# Altium PCB Power_switch_pcb.PcbDoc
Units mm, origin at the board's own origin, x right, y up, seen from the top; angles counter-clockwise.
Board outline 30 x 30 mm, 2 copper layers (Top Layer, Bottom Layer), stack 0.891 mm thick; 44 components, 20 nets, 133 pads, 42 vias.
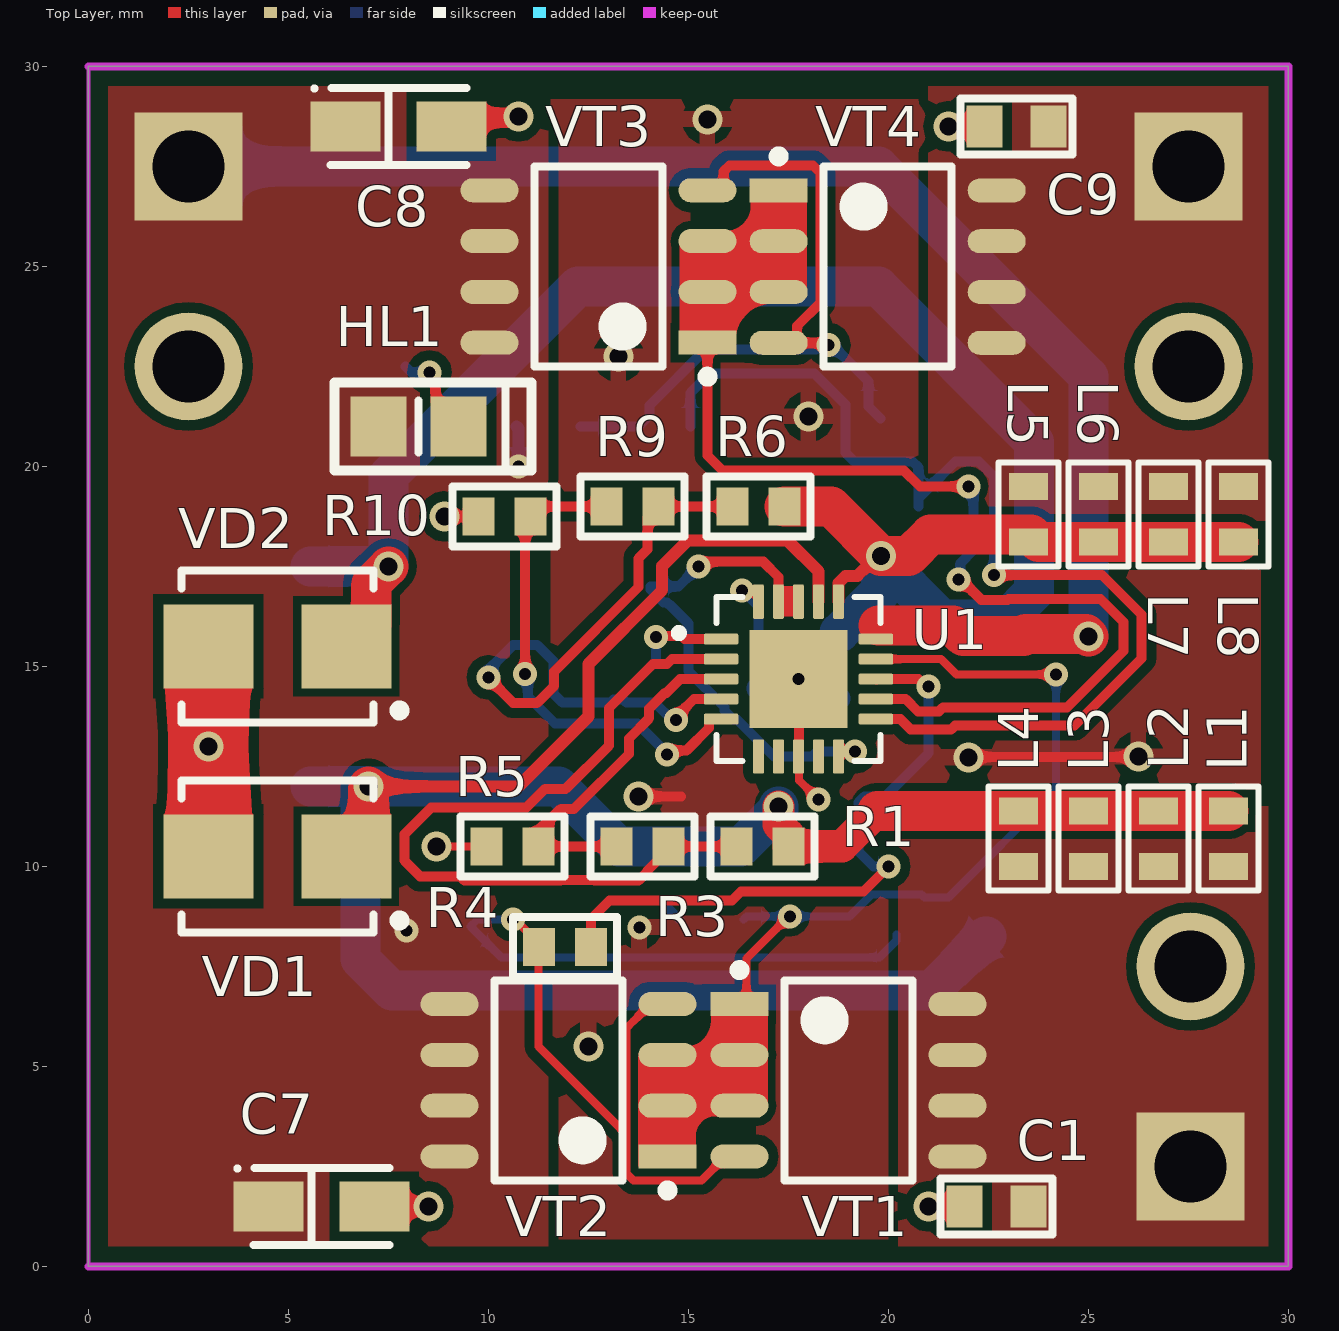
[diagram p0: Top Layer view]
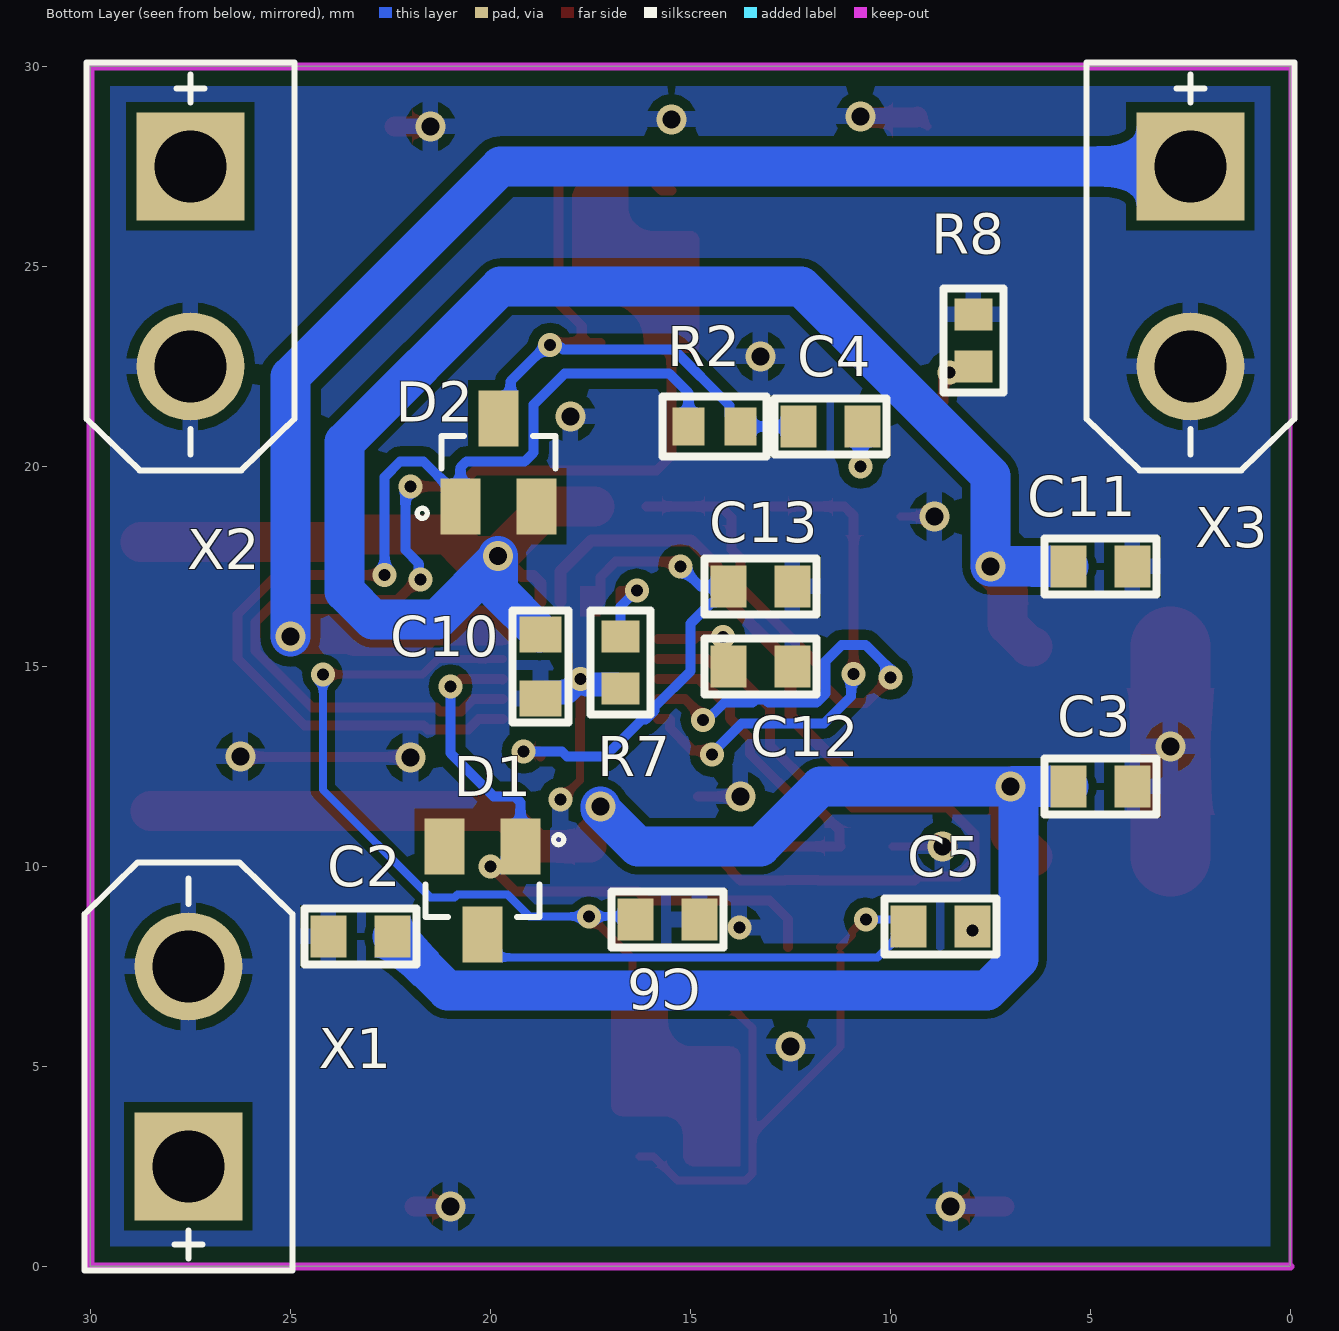
[diagram p1: Bottom Layer view, seen from below]
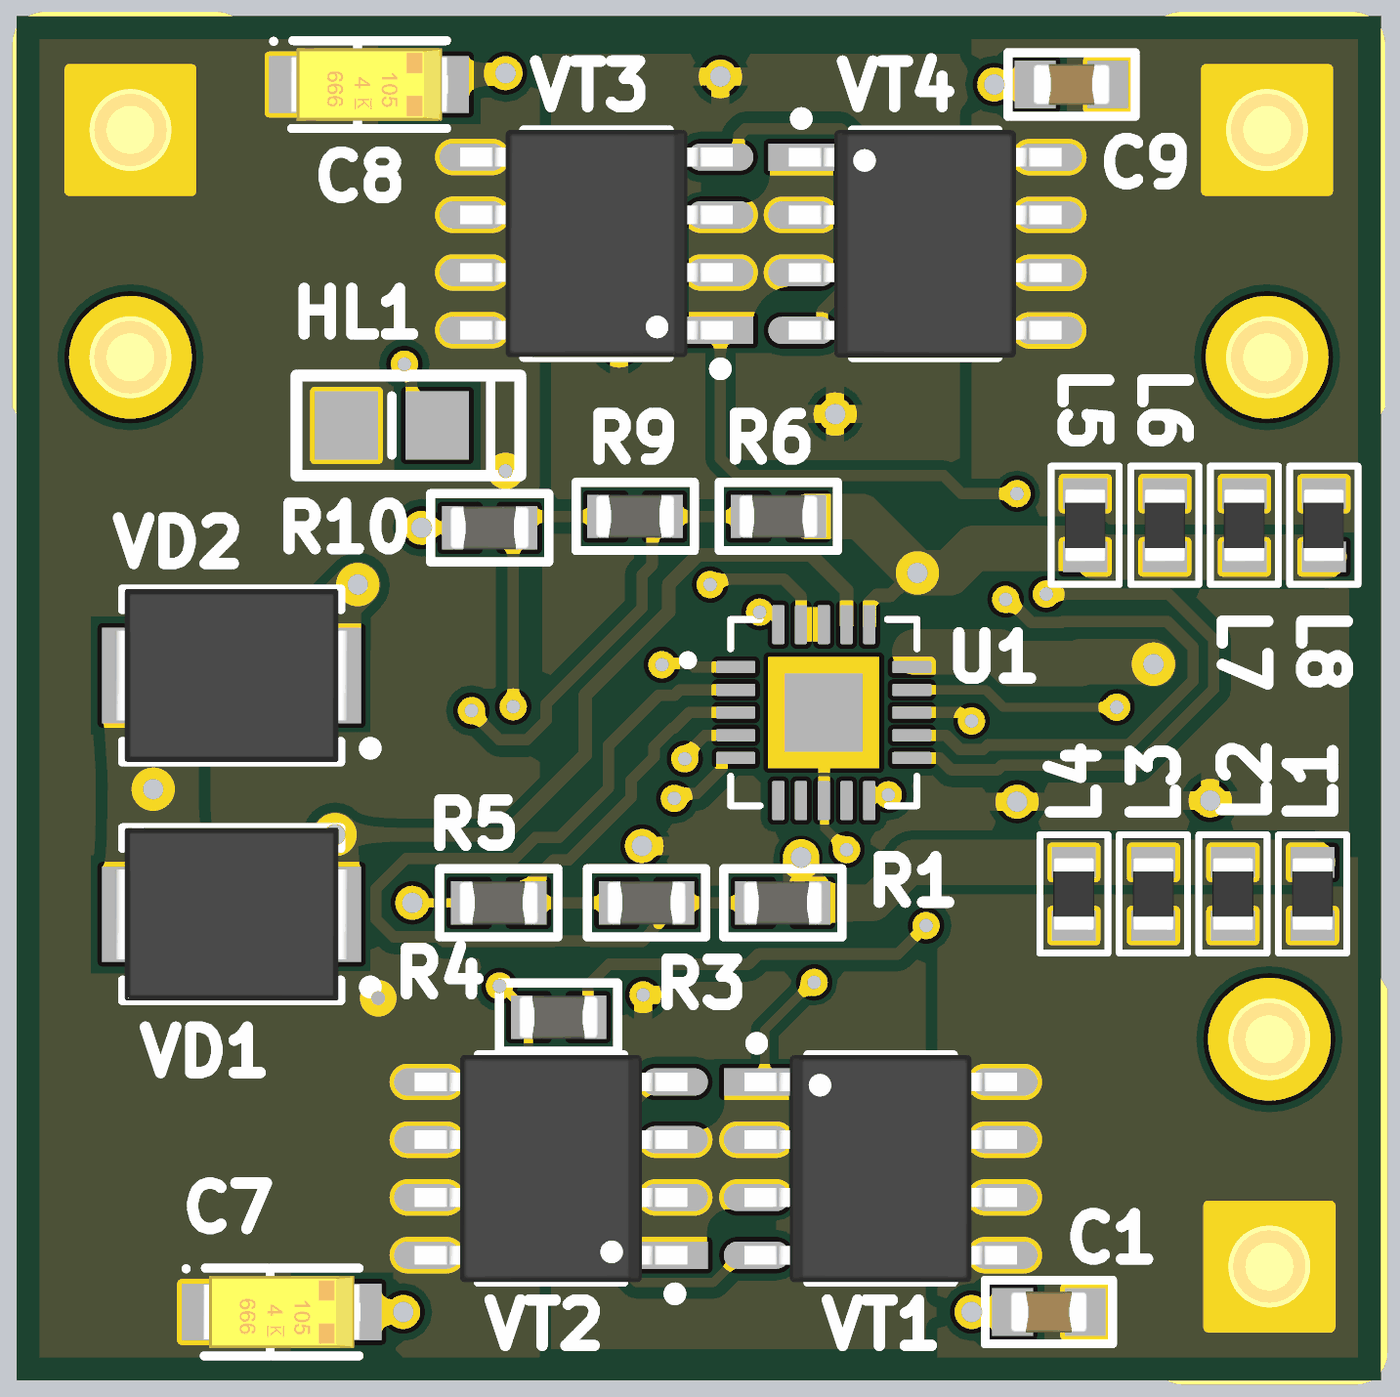
[diagram p2: 3D render of the assembled board from above, using the file's embedded part models]
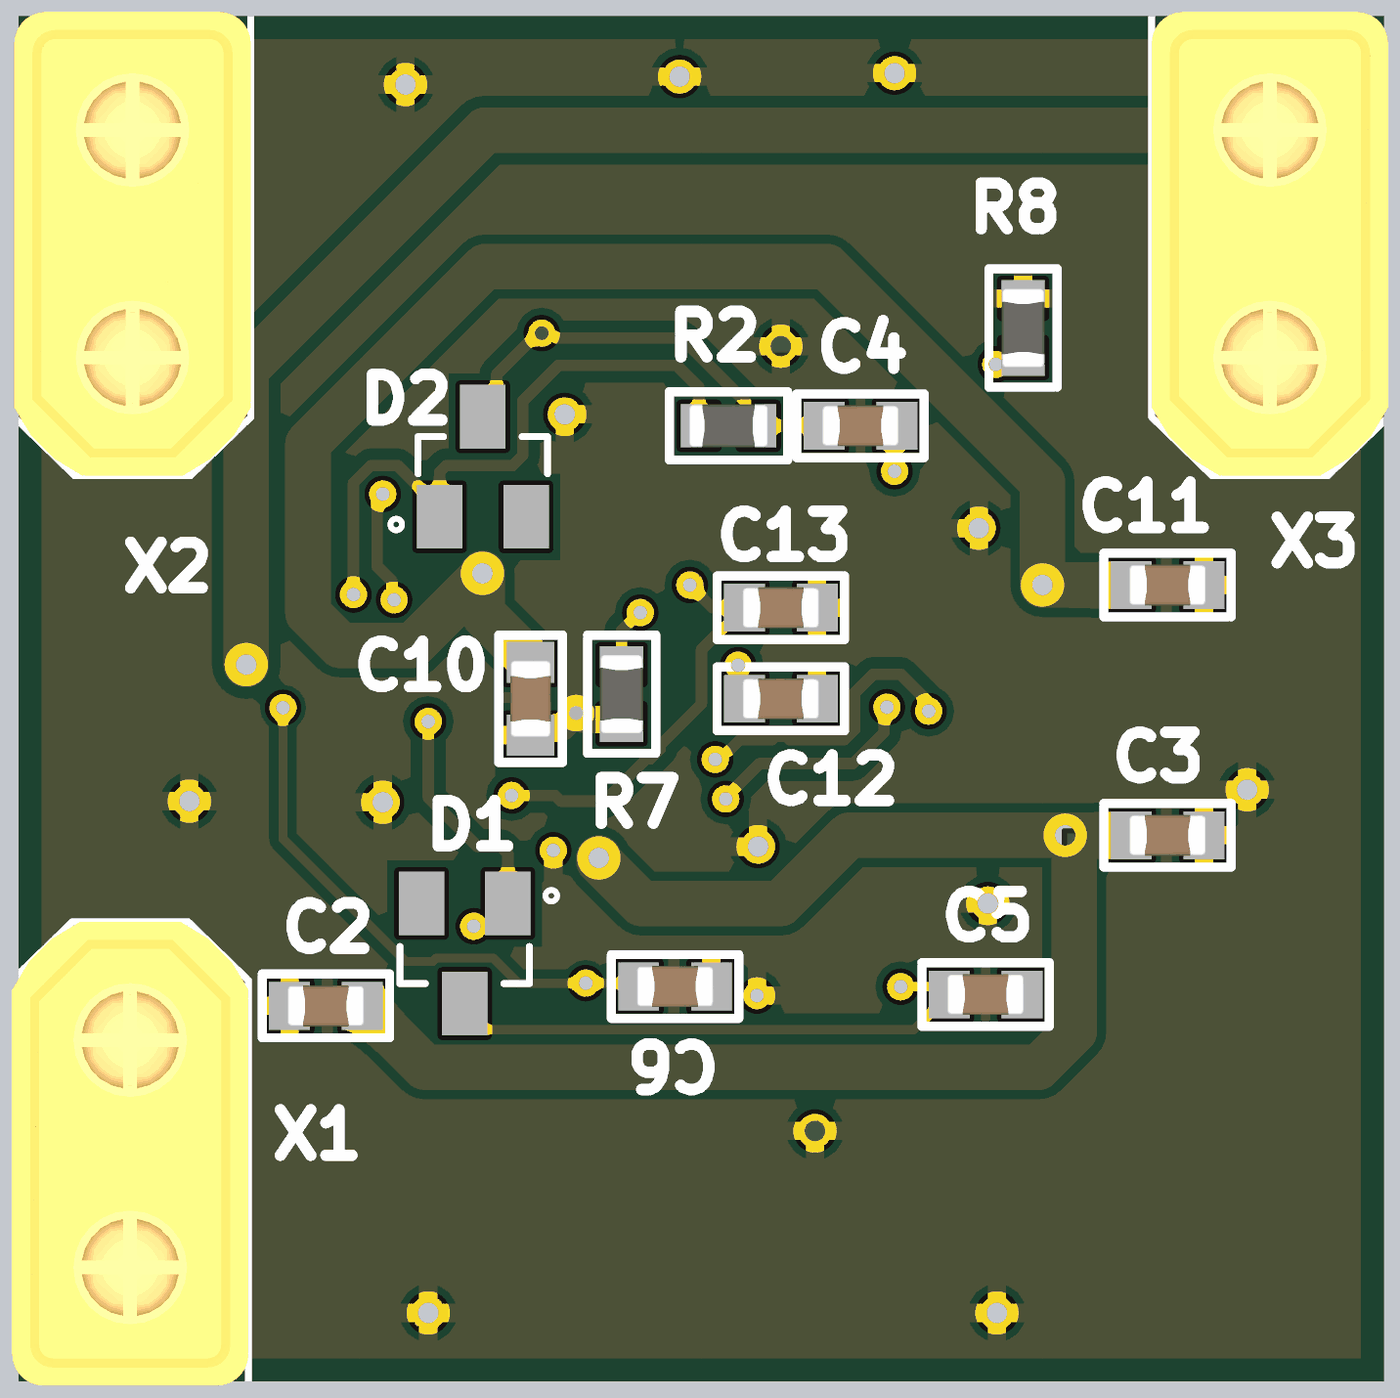
[diagram p3: 3D render of the assembled board from below, using the file's embedded part models]

## Layer stack, top to bottom
Top Solder: solder mask 0.0102, Solder Resist, Dk 3.5
Top Layer: signal copper 0.0356
Dielectric 1: dielectric 0.82, FR-4, Dk 4.8
Bottom Layer: signal copper 0.0356
Bottom Solder: solder mask 0.0102, Solder Resist, Dk 3.5

## Board outline
0,0 30,0 30,30 0,30

## Design rules (kind name [scope] priority, off if disabled: settings)
Clearance "V Clearance 5" [InNet('NetC6_2')] p1: gap=0.2 ignorepadtopadclearanceinfootprint=FALSE
Clearance "V Clearance 4" [InNet('NetC2_2')] p2: gap=0.2 ignorepadtopadclearanceinfootprint=FALSE
Clearance "V Clearance 3" [InNet('NetC10_2')] p3: gap=0.2 ignorepadtopadclearanceinfootprint=FALSE
Clearance "V Clearance" [InNetClass('V')] p4: gap=0.25 ignorepadtopadclearanceinfootprint=FALSE
Clearance "V Clearance 2" [InNet('NetU1_12')] p5: gap=0.2 ignorepadtopadclearanceinfootprint=FALSE
Clearance edge [InNamedPolygon('GND_L01_P000')] p6: gap=0.254 ignorepadtopadclearanceinfootprint=FALSE
Clearance "AISLER clearance" [All] p7: gap=0.25 ignorepadtopadclearanceinfootprint=FALSE
HoleSize [All] p1: absolutevalues=TRUE maxlimit=5.6 minlimit=0.25 maxpercent=80.000 minpercent=20.000
MinimumSolderMaskSliver [All] p1: minsoldermaskwidth=0.2
PolygonConnect PolygonConnect_2 [InNet('V_IN1') OR InNet('V_IN2')] p1: connectstyle=Direct reliefconductorwidth=0.5 reliefentries=4 polygonreliefangle="90 Angle" airgapwidth=0.254
PolygonConnect PolygonConnect_1 [All vs IsNamedPolygon('V_OUT_L01_P001')] p2: connectstyle=Direct reliefconductorwidth=0.5 reliefentries=4 polygonreliefangle="90 Angle" airgapwidth=0.25
PolygonConnect [All] p3: connectstyle=Relief reliefconductorwidth=0.4 reliefentries=4 polygonreliefangle="90 Angle" airgapwidth=0.254
RoutingVias "Rezonit Vias" [All] p1: holewidth=0.3 width=0.5 viastyle="Through Hole" minholewidth=0.3 minwidth=0.5 maxholewidth=0.45 maxwidth=0.65
SilkToSilkClearance [All] p1: silktosilkclearance=0.15
SilkToSolderMaskClearance [IsPad] p1: minsilkscreentomaskgap=0.15 clearancetoexposedcopper=TRUE
SolderMaskExpansion [All] p1: expansion=0.102 istentingtop=FALSE
Width V [InNetClass('V')] p1: maxlimit=3 minlimit=0.3 preferedwidth=1 minimp=50.000000 maximp=50.000000 favimp=50.000000
Width "Aisler compliant width" [All] p2: maxlimit=2 minlimit=0.2 preferedwidth=0.25 minimp=50.000000 maximp=50.000000 favimp=50.000000
26 further rules are at their usual default settings.

## Classes and differential pairs
polygon class PolygonClass_1: V_OUT_L01_P001
component class Sheet1: C1 C2 C3 C4 C5 C6 C7 C8 C9 C10 C11 C12 C13 D1 D2 HL1 L1 L2 L3 L4 L5 L6 L7 L8 R1 R2 R3 R4 R5 R9 R10 U1 VD1 VD2 VT1 VT2 VT3 VT4 X1 X2 X3

## Components (designator, comment, footprint, x,y, rotation, side; value= is the part's Value field where it differs from the comment)
C1 "Capacitor" 0603C 22.7,1.5 r0 top value="47 н"
C2 "Capacitor" 0603C 23.25,8.25 r180 bottom value="47 н"
C3 "Capacitor" 0603C 4.75,12 r0 bottom value="0,1 мк"
C4 "Capacitor" 0603C 11.5,21 r180 bottom value="10 н"
C5 "Capacitor" 0603C 8.75,8.5 r180 bottom value="10 н"
C6 "Capacitor" 0603C 15.575,8.675 r0 bottom value="0,1 мк"
C7 "Capacitor" TC_A 5.825,1.5 r0 top value="10 мк"
C8 "Capacitor" TC_A 7.75,28.5 r0 top value="10 мк"
C9 "Capacitor" 0603C 23.2,28.5 r0 top value="47 н"
C10 "Capacitor" 0603C 18.75,15 r90 bottom value="47 н"
C11 "Capacitor" 0603C 4.75,17.5 r0 bottom value="0,1 мк"
C12 "Capacitor" 0603C 13.25,15 r0 bottom value="10 н"
C13 "Capacitor" 0603C 13.25,17 r0 bottom value="0,1 мк"
D1 "" SOT23 20.2,9.4 r270 bottom
D2 "BAS70-04-7-F" SOT23 19.8,20.1 r90 bottom
HL1 "LED" 0805D 8.15,21.1 r0 top
L1 "BLM18EG121SN1D" 0603L 28.5,10.695 r90 top
L2 "Inductance" 0603L 26.75,10.695 r90 top
L3 "Inductance" 0603L 25,10.695 r90 top
L4 "Inductance" 0603L 23.25,10.695 r90 top
L5 "BLM18EG121SN1D" 0603L 23.5,18.805 r270 top
L6 "Inductance" 0603L 25.25,18.805 r270 top
L7 "Inductance" 0603L 27,18.805 r270 top
L8 "Inductance" 0603L 28.75,18.805 r270 top
R1 "Resistor" 0603R 16.85,10.5 r0 top value="100 к"
R2 "Resistor" 0603R 14.4,21 r180 bottom value=120
R3 "Resistor" 0603R 13.85,10.5 r0 top value="10 к"
R4 "Resistor" 0603R 11.915,7.986 r180 top value=120
R5 "Resistor" 0603R 10.6,10.5 r0 top value="10 к"
R6 "Resistor" 0603R 16.75,19 r0 top value="100 к"
R7 "Resistor" 0603R 16.75,15.1 r90 bottom value="160 к"
R8 "Resistor" 0603R 7.925,23.15 r270 bottom value="10 к"
R9 "Resistor" 0603R 13.6,19 r0 top value="10 к"
R10 "Resistor" 0603R 10.4,18.75 r0 top value="10 к"
U1 "LTC4418" QFN50 17.75,14.685 r0 top
VD1 "SMBJ18A" SMB 4.725,10.25 r180 top value="18 В"
VD2 "SMBJ18A" SMB 4.725,15.5 r180 top value="18 В"
VT1 "AO4411" SOIC-8 19,4.655 r0 top
VT2 "AO4411" SOIC-8 11.75,4.655 r180 top
VT3 "AO4411" SOIC-8 12.75,25 r180 top
VT4 "AO4411" SOIC-8 19.98,24.996 r0 top
X1 "XT30UPB-M" XT30UPB-M 27.55,5 r90 bottom
X2 "XT30UPB-M" XT30UPB-M 27.5,25 r270 bottom
X3 "XT30UPB-M" XT30UPB-M 2.5,25 r270 bottom

## Footprints (in the part's own frame and the unit in brackets; to place one, negate y for a bottom-side part, rotate by r counter-clockwise, add the part's x,y. Pads: shape width x height; smd on the part's side, far side on the other; paste and mask are expansions set on the pad)
0603C [mm] "Chip Resistor, 2-Leads, Body 1,40x0,80mm, IPC Medium Density"
  rect 0.9x1.05 smd: 1(-0.8,0) 2(0.8,0)
  silkscreen extent -1.4,-0.7 1.4,0.7, body extent -0.85,-0.45 0.85,0.45, height 0.9
0603L [mm] "Chip Inductor, 2-Leads, Body 1,55x0,85mm, IPC Medium Density"
  rect 0.67x0.97 smd: 1(-0.695,0) 2(0.695,0)
  silkscreen extent -1.3,-0.75 1.3,0.75, body extent -0.8,-0.45 0.8,0.45, height 0.45
0603R [mm] "Chip Resistor, 2-Leads, Body 1.60x0.85mm, IPC Medium Density"
  rect 0.8x0.95 smd: 1(-0.65,0) 2(0.65,0)
  silkscreen extent -1.3,-0.75 1.3,0.75, body extent -0.87,-0.47 0.88,0.48, height 0.9
0805D [mm]
  rect 1.4x1.5 smd: 1(-0.9,-0.1) 2(1.1,-0.1)
  silkscreen extent -2,-1.2 2.93,1, body extent -0.97,-0.8 1.17,0.6, height 0.7
QFN50 [mm]
  rrect25% 0.86x0.27 smd: 1(-1.935,1) 2(-1.935,0.5) 3(-1.935,0) 4(-1.935,-0.5) 5(-1.935,-1) 11(1.935,-1) 12(1.935,-0.5) 13(1.935,0) 14(1.935,0.5) 15(1.935,1)
  rrect25% 0.27x0.86 smd: 6(-1,-1.935) 7(-0.5,-1.935) 8(0,-1.935) 9(0.5,-1.935) 10(1,-1.935) 16(1,1.935) 17(0.5,1.935) 18(0,1.935) 19(-0.5,1.935) 20(-1,1.935)
  rect 2.45x2.45 smd paste-0.365: 21(0,0)
  silkscreen extent -3.09,-2.05 2.05,2.05
SMB [mm] "Diod"
  rect 2.25x2.1 smd: 1(1.725,0) 2(-1.725,0)
  silkscreen extent -3.18,-1.9 2.4,1.9, body extent -2.57,-1.9 2.57,1.9, height 2.4
SOIC-8 [mm] "for operational amplifier"
  rect 1.45x0.6 smd: 1(-2.725,1.905)
  oval 1.45x0.6 smd: 2(-2.725,0.635) 3(-2.725,-0.635) 4(-2.725,-1.905) 5(2.725,-1.905) 6(2.725,-0.635) 7(2.725,0.635) 8(2.725,1.905)
  silkscreen extent -2.85,-2.5 1.6,2.88, body extent -3,-2.5 3,2.5, height 1.75
SOT23 [mm]
  rect 1.4x1 smd: 1(-1.1,0.95) 2(-1.1,-0.95) 3(1.1,0)
  silkscreen extent -1.4,-1.42 0.66,2.03
TC_A [mm] "Tantalum capacitor, type A,  1 pin - plus"
  rect 1.75x1.25 smd: 1(-1.325,0) 2(1.325,0)
  silkscreen extent -2.15,-0.97 1.7,1, body extent -1.73,-0.8 1.73,0.8, height 1.64
XT30UPB-M [mm]
  round 2.7 hole 1.8: N(2.5,0)
  rect 2.7x2.7 hole 1.8: P(-2.5,0)
  silkscreen extent -5.1,-2.6 5.1,2.6, body extent -5.1,-2.6 5.1,2.6, height 10.7

## Part data
C1 C2 C9 C10: library part Capacitor_47n_10_50V_X7R_0603C, "Конденсатор", Capacity (nF)=47, Dielectric=X7R, Tolerance=0,1, Voltage (V)=50, Part Number=Capacitor_47n_10_50V_X7R_0603C
C3 C6 C11 C13: library part Capacitor_0,1u_10_50V_X7R_0603C, "Конденсатор", Capacity (nF)=100, Dielectric=X7R, Tolerance=0,1, Voltage (V)=50, Part Number=Capacitor_0,1u_10_50V_X7R_0603C
C4 C5 C12: library part Capacitor_10n_10_50V_X7R_0603C, "Конденсатор", Capacity (nF)=10, Dielectric=X7R, Tolerance=0,1, Voltage (V)=50, Part Number=Capacitor_10n_10_50V_X7R_0603C
C7 C8: library part Capacitor_10u_10_50V_TC_A, "Танталовый конденсатор", Capacity (uF)=10, Tolerance=0,1, Voltage (V)=50, Part Number=Capacitor_10u_10_50V_TC_A, Type=Tantalum
D1: library part BAS70-04-7-F, "Diode Array 1 Pair Series Connection Schottky 70V 70mA (DC) Surface Mount TO-236-3, SC-59, SOT-23-3", Package="SOT-23 Diodes Inc.", Availability=Good, DigiKey-Purchase-URL=https://snapeda.com/shop?store=DigiKey&id=46815, MF="Diodes Inc.", Mouser-Purchase-URL=https://snapeda.com/shop?store=Mouser&id=46815, MP=BAS70-04-7-F, Price=None, SnapEDA_Link=https://www.snapeda.com/parts/BAS70-04-7-F/Diodes%20Inc./view-part/46815/?ref=snap
D2: "Diode Array 1 Pair Series Connection Schottky 70V 70mA (DC) Surface Mount TO-236-3, SC-59, SOT-23-3", Package="SOT-23 Diodes Inc.", Availability=Good, DigiKey-Purchase-URL=https://snapeda.com/shop?store=DigiKey&id=46815, MF="Diodes Inc.", Mouser-Purchase-URL=https://snapeda.com/shop?store=Mouser&id=46815, MP=BAS70-04-7-F, Price=None, SnapEDA_Link=https://www.snapeda.com/parts/BAS70-04-7-F/Diodes%20Inc./view-part/46815/?ref=snap
HL1: "Светодиод", Color={Цвет}, Part Number=LED
L1 L5: library part Inductance, "Катушка индуктивности", Part Number=Inductance
L2 L3 L4 L6 L7 L8: "Катушка индуктивности", Part Number=Inductance
R1 R6: library part Resistor_100k_1_0603, "Резистор номиналом 100 кОм и точностью 1%", Tolerance=1%, Part Number=Resistor_100k_1_0603
R2 R4: library part Resistor_120_1_0603, "Резистор номиналом 120 Ом и точностью 1%", Tolerance=1%, Part Number=Resistor_120_1_0603
R3 R5 R8 R9 R10: library part Resistor_10k_1_0603, "Резистор номиналом 10 кОм и точностью 1%", Tolerance=1%, Part Number=Resistor_10k_1_0603
R7: library part Resistor_160k_1_0603, "Резистор номиналом 160 кОм и точностью 1%", Tolerance=1%, Part Number=Resistor_160k_1_0603
U1: Package="QFN -20 Analog Devices", Availability="In Stock", Check_prices=https://www.snapeda.com/parts/LTC4418IUF%23PBF/Analog+Devices/view-part/?ref=eda, MF="Analog Devices", MP=LTC4418IUF#PBF, Part Number=LTC4418, Price=None, Purchase-URL=https://pricing.snapeda.com/search?q=LTC4418IUF#PBF&ref=eda, SnapEDA_Link=https://www.snapeda.com/parts/LTC4418IUF%23PBF/Analog+Devices/view-part/?ref=snap
VD1 VD2: "Защитный диод на 18 В, рассеиваемая мощность 600 Вт", Part Number=SMBJ18A
VT1 VT2 VT3 VT4: "P-канальный MOSFET", Part Number=AO4411
X1 X2 X3: "2-пиновый разъем с ключом", Value1="эта плюс", Value2="это пинус", Part Number=XT30UPB-M

## Via types
v1: diameter 0.6, hole 0.3, Top Layer to Bottom Layer, 23 vias
v2: diameter 0.75, hole 0.45, Top Layer to Bottom Layer, 19 vias

## Nets (pads, with @x,y where several pads share a name; then routed paths per layer and width w, separated by ;. In a path a pad name is that pad's centre, name@x,y a point inside that pad or via, vN(x,y) a via of type N, cw(c..) or ccw(c..) an arc to the next point about the centre after c; other vN are vias at no path point)
GND: C1.1 C2.1 C3.1 C6.1 C7.2 C8.2 C9.1 C10.1 C11.1 C12.1 C13.1 R5.1 R7.1 R8.1 R10.1 U1.8 U1.21 VD1.1 VD2.1 X1.N X2.N X3.N | length 24.1
  Top Layer w0.2: v2(8.7,10.5) R5.1 ; v2(8.9,18.75) R10.1 ; C8.2 C8.2@9.325,28.75 ; U1.8 17.759,12.741 17.765,12.735 17.765,12.154 v1(18.251,11.668)
  Top Layer w0.25: v2(13.75,11.75) 14.815,11.75 ; v1(17.75,14.685) 17.759,12.75 U1.8@17.759,12.741 ; v1(18.251,11.668) 18.251,11.716 v1@18.3,11.765 ; v2(22,12.725) 22.013,12.738 26.238,12.738 v2(26.25,12.75)
  Top Layer w0.5: C7.2 v2(8.5,1.5) ; C8.2@9.325,28.75 9.354,28.721 10.721,28.721 v2(10.75,28.75) ; v2(21,1.5) C1.1 ; v2(21.5,28.5) C9.1
  Top Layer w2: VD1.1 v2(3,13) VD2.1
  Bottom Layer w0.2: C10.1@18.4,14.55 C10.1
  Bottom Layer w0.25: C6.1@14.525,8.925 C6.1
  Bottom Layer w0.6: R7.1 16.848,14.548 17.6,14.548 17.737,14.685 v1(17.75,14.685) 18.06,14.375 18.174,14.375 18.199,14.35 18.6,14.35 C10.1
  other v1: 13.775,8.475
  other v2: 12.5,5.5 18,21.25 13.25,22.75 15.475,28.675
NetC2_2: C2.2 C3.2 L1.2 L2.2 L3.2 L4.2 R1.2 U1.17 VD1.2 | length 64.2
  Top Layer w0.3: v2(7,12) 10.75,12 12.5,13.75 12.5,15.062 14.344,16.906 14.344,17.513 14.981,18.15 17.477,18.15 18.25,17.377 U1.17
  Top Layer w0.8: v2(17.25,11.5) 17.25,11.044 17.5,10.794 R1.2 18.835,10.5 19.725,11.39
  Top Layer w1: VD1.2 7,10.8 v2(7,12) ; 19.725,11.39 L4.2 L3.2 L2.2 L1.2
  Bottom Layer w1: C3.2 v2(7,12) ; v2(17.25,11.5) 17.25,11.435 16.315,10.5 13.25,10.5 11.75,12 v2(7,12) ; C2.2 22.425,8.25 21.075,6.9 7.585,6.9 6.8,7.685 6.8,11.8 v2(7,12)
NetC4_1: C4.1 D2.3 R2.2 VT3.4 VT4.4 | length 18.8
  Top Layer w0.25: VT3.4 15.718,26.905 15.88,27.067 15.88,27.38 16.026,27.526 18.114,27.526 18.305,27.336 18.305,24.103 17.714,23.512 17.714,23.253 VT4.4@17.626,23.165 ; VT4.4 17.533,23.091 17.68,23.091 17.887,23.091 18.461,23.08 v1(18.506,23.035)
  Bottom Layer w0.25: C4.1 R2.2 14.025,21.275 14.025,21.525 15.43,22.93 18.184,22.93 18.223,22.968 18.439,22.968 v1(18.506,23.035) ; v1@18.484,23.016 18.547,23.079 19.498,22.128 19.498,21.502 D2.3
NetC5_1: C5.1 D1.3 R4.2 VT1.4 VT2.4 | length 26.9
  Top Layer w0.2: v1(10.615,8.669) 10.668,8.669 10.965,8.373 10.965,8.286 R4.2 ; R4.2@11.25,7.809 11.25,7.75 11.25,5.5 13.45,3.3 ; 13.45,5.94 13.45,3.3 ; 13.45,5.96 13.608,6.118 13.612,6.118 14.054,6.56 VT2.4 ; VT1.4 15.924,2.75 15.324,2.15 13.626,2.15 13.45,2.326 13.45,3.3
  Bottom Layer w0.2: v1(10.615,8.669) 9.719,8.669 C5.1 10.325,7.725 19.775,7.725 20.2,8.15 D1.3
NetC6_2: C6.2 U1.14 VT1.1 VT1.2 VT1.3 VT2.1 VT2.2 VT2.3 | length 19.5
  Top Layer w0.2: VT1.1 16.45,6.735 16.45,7.7 17.5,8.75 v1(17.537,8.75) ; U1.14 21.315,15.185 21.7,14.8 23.983,14.8 23.985,14.803 v1(24.193,14.803)
  Bottom Layer w0.2: C6.2 16.45,8.75 v1@17.469,8.75 ; v1(17.537,8.75) 19.026,8.75 19.576,9.3 20.824,9.3 20.899,9.225 21.499,9.225 24.193,11.918 v1(24.193,14.803)
  Bottom Layer w0.25: v1@17.469,8.75 v1(17.537,8.75)
NetC10_2: C10.2 C11.2 L5.2 L6.2 L7.2 L8.2 R6.2 U1.16 VD2.2 | length 51.3
  Top Layer w0.3: U1.16 18.753,16.623 18.753,17.09 18.928,17.265 19.223,17.265 19.714,17.757 v2(19.809,17.757)
  Top Layer w1: VD2.2 6.525,15.5 7.075,16.05 7.075,17.075 v2(7.5,17.5) ; R6.2 18.565,19 v2(19.809,17.757) 20.507,17.757 21.05,18.3 23.56,18.3 23.75,18.11 L6.2 L7.2 L8.2
  Bottom Layer w1: C11.2 v2(7.5,17.5) 7.5,19.765 12.235,24.5 19.75,24.5 23.644,20.606 23.644,16.877 22.942,16.175 21.336,16.175 19.809,17.702 v2@19.809,17.751 ; C10.2@18.775,15.85 19.809,16.884 v2@19.809,17.751 ; v2(19.809,17.757) v2@19.809,17.751
NetC12_2: C12.2 U1.1 | length 2.5
  Top Layer w0.25: v1(14.189,15.737) 14.219,15.767 14.821,15.767 14.903,15.685 U1.1
  Bottom Layer w0.25: C12.2 14.189,15.139 v1(14.189,15.737)
NetC13_2: C13.2 U1.10 U1.18 U1.19 | length 12.5
  Top Layer w0.25: v1(15.25,17.5) 15.369,17.619 16.872,17.619 17.25,17.24 U1.19 ; U1.10 18.75,12.864 18.76,12.874 v1(19.169,12.874)
  Bottom Layer w0.25: v1(15.25,17.5) 14.75,17 C13.2 14.05,16.925 14.375,16.6 14.466,16.6 14.521,16.544 14.531,16.544 14.995,16.08 14.995,14.89 15.9,13.985 15.9,13.895 16.12,13.675 16.21,13.675 17.135,12.75 18.086,12.75 18.21,12.874 v1(19.169,12.874)
NetD1_1: D1.1 R4.1 U1.13 | length 16.1
  Top Layer w0.25: R4.1 12.564,8.689 13.025,9.15 16.088,9.15 16.312,9.375 19.375,9.375 v1(20,10) ; U1.13@19.695,14.675 U1.13 20.747,14.685 20.932,14.5 v1(21,14.5)
  Bottom Layer w0.25: v1(20,10) 19.625,10 19.25,10.375 D1.1 19.25,11.604 19.396,11.75 19.919,11.75 21,12.831 v1(21,14.5)
NetD2_1: D2.1 R2.1 U1.11 | length 27
  Top Layer w0.25: U1.11 20.295,13.685 20.555,13.425 21.569,13.425 21.669,13.525 24.649,13.525 26.325,15.201 26.325,16.299 25.339,17.285 22.65,17.285 v1(22.644,17.291)
  Bottom Layer w0.25: R2.1 15.05,21.843 15.532,22.325 18.145,22.325 18.925,21.545 18.925,20.345 19.145,20.125 20.604,20.125 20.75,19.979 D2.1@20.75,19.2 ; D2.1 D2.1@20.75,19.2 ; v1(22.644,17.291) 22.644,19.74 22.259,20.125 21.675,20.125 D2.1@20.75,19.2
NetHL1_2: HL1.2 R8.2 | length 1.8
  Top Layer w0.25: v1(8.525,22.35) 8.525,22.255 8.675,22.105 8.675,21.625 8.9,21.4 HL1.2@8.95,21.4
  Bottom Layer w0.25: R8.2 8.075,22.35 v1(8.525,22.35)
NetR1_1: R1.1 R3.2 U1.2 | length 19.9
  Top Layer w0.25: U1.2 14.585,15.185 14.462,15.062 14.112,15.062 13.011,13.961 13.011,13.02 11.932,11.941 11.411,11.941 10.945,11.475 8.569,11.475 7.9,10.806 7.9,10.144 8.294,9.75 9.295,9.75 9.395,9.65 11.805,9.65 11.812,9.657 12.638,9.657 12.645,9.65 13.755,9.65 13.975,9.87 13.975,9.9 14.5,10.425 R3.2 R1.1
NetR3_1: R3.1 R5.2 U1.3 | length 8.8
  Top Layer w0.25: R3.1 R5.2 11.272,10.522 11.272,10.905 11.808,11.441 12.139,11.441 13.511,12.813 13.511,13.201 14.018,13.707 14.018,13.947 14.413,14.342 14.449,14.342 14.792,14.685 15.01,14.685 U1.3
NetR6_1: R6.1 R9.2 U1.4 | length 17.3
  Top Layer w0.25: v1(10,14.728) 10,14.707 10.618,14.089 11.219,14.089 11.643,14.513 11.643,14.877 13.75,16.984 13.75,17.704 13.975,17.929 13.975,18.725 R9.2 R6.1 ; v1(14.693,13.667) 14.693,13.738 15.14,14.185 U1.4
  Bottom Layer w0.25: v1(10,14.728) 10,14.921 10.618,15.539 11.219,15.539 11.625,15.132 11.625,14.32 11.845,14.1 13.055,14.1 13.128,14.173 13.372,14.173 13.445,14.1 14.15,14.1 14.41,13.84 14.425,13.84 14.598,13.667 v1(14.693,13.667)
NetR7_2: R7.2 U1.20 | length 2
  Top Layer w0.25: v1(16.339,16.894) 16.341,16.892 16.74,16.892 16.75,16.882 U1.20
  Bottom Layer w0.25: v1(16.339,16.894) 16.356,16.894 16.75,16.5 R7.2
NetR9_1: R9.1 R10.2 U1.5 | length 12.6
  Top Layer w0.25: v1(10.918,14.814) 10.918,18.768 11.15,19 R9.1 ; v1(14.462,12.797) 14.569,12.905 14.956,12.905 15.51,13.459 15.51,13.675 15.52,13.685 U1.5
  Bottom Layer w0.25: v1(10.918,14.814) 10.985,14.747 10.985,14.252 11.663,13.575 13.72,13.575 14.438,12.857 14.438,12.821 v1(14.462,12.797)
NetU1_12: U1.12 VT3.1 VT3.2 VT3.3 VT4.1 VT4.2 VT4.3 | length 24.4
  Top Layer w0.25: VT3.1 15.475,20.275 15.849,19.901 20.385,19.901 20.786,19.5 v1(22,19.5) ; U1.12 20.431,14.185 20.741,13.875 21.259,13.875 21.359,13.975 24.462,13.975 25.875,15.388 25.875,16.112 25.302,16.685 22.998,16.685 22.979,16.666 22.319,16.666 21.81,17.175 v1(21.75,17.175)
  Bottom Layer w0.25: v1(21.75,17.175) 21.797,17.222 21.797,17.582 22.125,17.91 22.125,19.307 22,19.432 v1(22,19.5)
V_IN1: C1.2 L1.1 L2.1 L3.1 L4.1 VT1.5 VT1.6 VT1.7 VT1.8 X1.P
V_IN2: C9.2 L5.1 L6.1 L7.1 L8.1 VT4.5 VT4.6 VT4.7 VT4.8 X2.P
V_OUT: C4.2 C5.2 C7.1 C8.1 HL1.1 U1.15 VT2.5 VT2.6 VT2.7 VT2.8 VT3.5 VT3.6 VT3.7 VT3.8 X3.P | length 37.7
  Top Layer w1: 19.75,16.02 21.611,16.02 21.871,15.76 23.381,15.76 23.431,15.81 24.94,15.81 v2(25,15.75)
  Bottom Layer w0.3: v1(7.95,8.4) 8,8.45 C5.2 ; C4.2 10.75,20.95 v1(10.75,20)
  Bottom Layer w1: X3.P 19.75,27.5 25,22.25 v2(25,15.75)
pads on no net: D1.2 D2.2 U1.6 U1.7 U1.9

## Polygon pours and split planes (outlines as drawn)
GND on Top Layer "GND_L01_P004" (solid, pour order 4): 11.553,0.692 11.553,29.179 21.047,29.179 21.053,29.186 21.053,18.186 29.303,18.186 29.303,11.186 20.553,11.186 20.303,11.436 20.303,0.686 11.56,0.686
V_OUT on Top Layer "V_OUT_L01_P001" (solid, pour order 1): 0.5,29.5 11.5,29.5 11.5,0.5 0.5,0.5
V_IN1 on Top Layer "V_IN1_L01_P003" (solid, pour order 3): 29.5,0.5 29.5,11.5 20.25,11.5 20.25,0.5
V_IN2 on Top Layer "V_IN2_L01_P002" (solid, pour order 2): 29.5,29.5 21,29.5 21,18.25 29.5,18.25
GND on Bottom Layer "GND_L02_P000" (solid, pour order 0): 0.5,29.5 29.5,29.5 29.5,0.5 0.5,0.5

## Keep-outs
Keep-Out Layer:
  the board outline again, w0.2

## Other copper
Top Layer:
  region net NetC6_2: 13.75,2.5 13.75,5.25 cw(c14,5.25) 14,5.5 14.927,5.5 ccw(c14.927,6.142) 15.569,6.142 15.569,6.789 cw(c15.587,6.789) 15.587,6.807 16.57,6.807 cw(c16.57,6.398) 16.98,6.398 16.98,4.03 cw(c16.709,4.03) 16.709,3.76 15.679,3.76 ccw(c15.679,3.263) 15.182,3.263 15.182,2.777 cw(c14.908,2.777) 14.908,2.503
  region net NetU1_12: 16.563,27.157 17.525,27.157 cw(c17.525,26.724) 17.957,26.724 17.957,24.404 cw(c17.62,24.404) 17.62,24.067 17.092,24.067 ccw(c17.092,23.144) 16.169,23.144 cw(c15.867,23.144) 15.867,22.842 14.951,22.842 cw(c14.951,23.014) 14.779,23.014 14.779,25.664 cw(c15.001,25.664) 15.001,25.886 15.924,25.886 ccw(c15.924,26.521) 16.56,26.521 16.56,27.008
  region net NetC13_2: 17.25,16.25 17.75,16.25 17.75,17 17.25,17